# Altium PCB nrf52810_qcaa_dcdc.PcbDoc
Units mil, origin at the board's own origin, x right, y up, seen from the top; angles counter-clockwise.
Board outline 618 x 551 mil, 2 copper layers (Top Layer, Bottom Layer), stack 65.8 mil thick; 19 components, 31 nets, 72 pads, 43 vias.
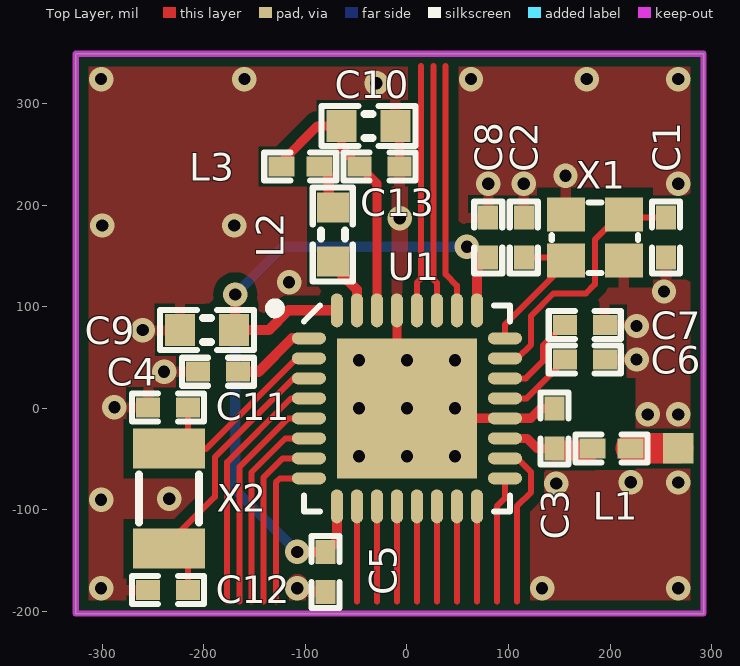
[diagram p0: Top Layer view]
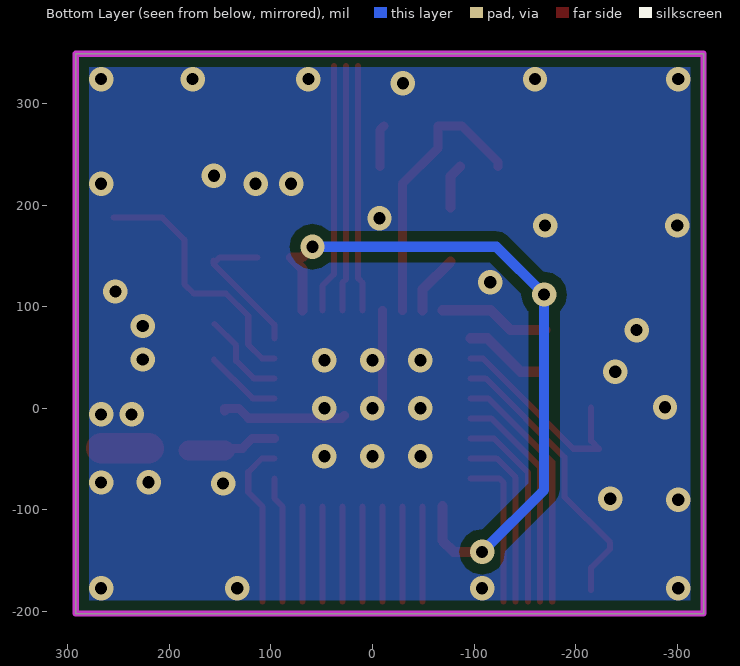
[diagram p1: Bottom Layer view, seen from below]
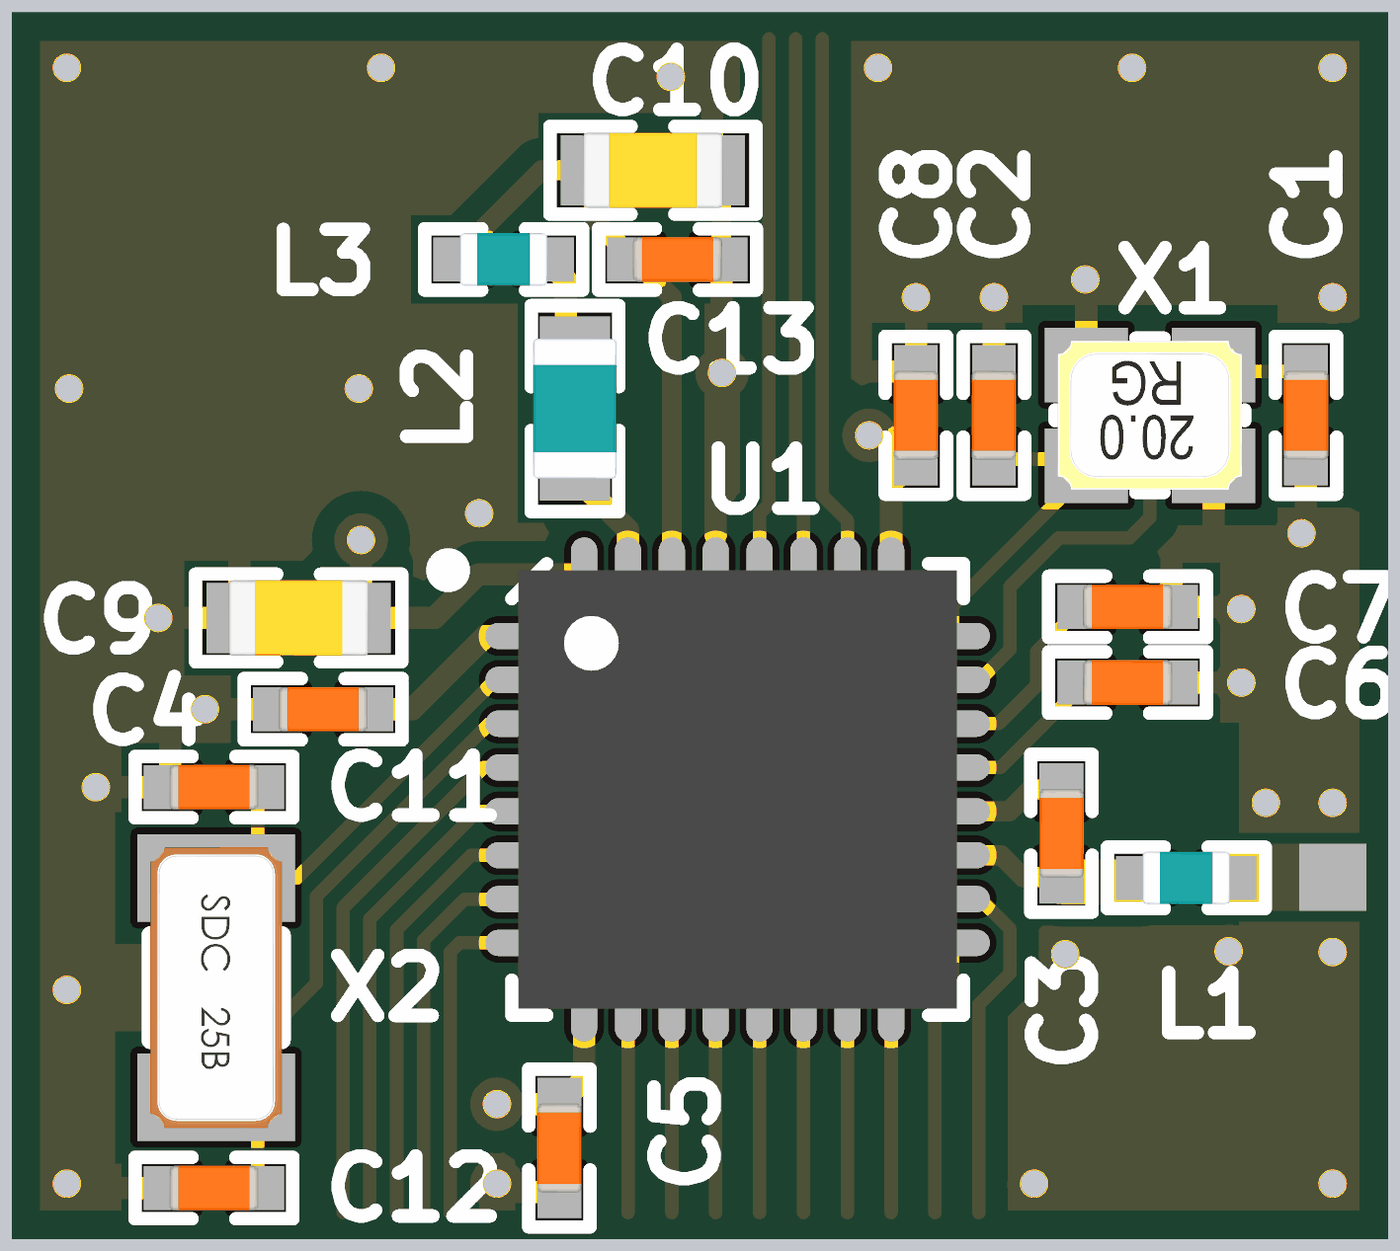
[diagram p2: 3D render of the assembled board from above, using the file's embedded part models]

## Layer stack, top to bottom
Top Solder: solder mask 0.4, Solder Resist, Dk 3.5
Top Layer: signal copper 1.4
Dielectric1: core 63, FR-4, Dk 4.8
Bottom Layer: signal copper 1.4
Bottom Solder: solder mask 0.4, Solder Resist, Dk 3.5

## Board outline
-326,-202 292,-202 292,349 -326,349

## Design rules (kind name [scope] priority, off if disabled: settings)
Clearance Polygon_ANT [(InNamedPolygon('Top_Layer-GND')) or (InNamedPolygon('Bottom_Layer-GND')) vs InNet('RF')] p1: gap=5 ignorepadtopadclearanceinfootprint=FALSE except(0: Arc-Hole Track-Hole SMDPad-Hole THPad-Hole Via-Hole Fill-Hole Poly-Hole Region-Hole Text-Hole)
Clearance Polygon [(InNamedPolygon('Top_Layer-GND')) or (InNamedPolygon('Bottom_Layer-GND'))] p2: gap=10 ignorepadtopadclearanceinfootprint=FALSE except(0: Arc-Hole Track-Hole SMDPad-Hole THPad-Hole Via-Hole Fill-Hole Poly-Hole Region-Hole Text-Hole)
Clearance [All] p3: gap=6 ignorepadtopadclearanceinfootprint=FALSE except(0: Arc-Hole Track-Hole SMDPad-Hole THPad-Hole Via-Hole Fill-Hole Poly-Hole Region-Hole Text-Hole)
ComponentClearance [All] p1 off: gap=10 collisioncheckmode=3 verticalgap=10 showdistances=FALSE
FabricationTestPointUsage TestPointUsage [All] p1: valid=0 allowmultiple=FALSE
FabricationTestpoint Testpoint [All] p1: side=3 testpointundercomponent=TRUE minsize=40 maxsize=100 preferedsize=60 minholesize=0 maxholesize=40 preferedholesize=32 testpointgrid=1 allowsidetop=TRUE allowsidebottom=TRUE usegrid=TRUE gridtolerance=0.01
Height [All] p1 off: minheight=0 maxheight=1000 prefheight=500
HoleSize [All] p1: absolutevalues=TRUE maxlimit=160 minlimit=12 maxpercent=80.000 minpercent=20.000
MinimumAnnularRing [All] p1 off: minimumring=6
PolygonConnect PolygonConnect_1 [isVia and innet(gnd)] p1: connectstyle=Direct reliefconductorwidth=10 reliefentries=4 polygonreliefangle="90 Angle" airgapwidth=10
PolygonConnect [All] p2: connectstyle=Relief reliefconductorwidth=10 reliefentries=4 polygonreliefangle="90 Angle" airgapwidth=10
RoutingVias [All] p1: holewidth=16 width=32 viastyle="Through Hole" minholewidth=10 minwidth=10 maxholewidth=28 maxwidth=50
SilkToSolderMaskClearance SilkscreenOverComponentPads [IsPad] p1: minsilkscreentomaskgap=10 clearancetoexposedcopper=TRUE
SolderMaskExpansion [All] p1: expansion=3
Width [All] p1: maxlimit=100 minlimit=6 preferedwidth=6
24 further rules are at their usual default settings.

## Components (designator, comment, footprint, x,y, rotation, side; value= is the part's Value field where it differs from the comment)
C1 "12pF" CAPC1005X04L 255,168 r270 top
C2 "12pF" CAPC1005X04L 115,168 r90 top
C3 "0.8pF" CAPC1005X04L 145.32,-19.69 r270 top
C4 "100nF" CAPC1005X04L -186,36 r180 top
C5 "100nF" CAPC1005X04L -80,-161 r270 top
C6 "N.C." CAPC1005X04L 175,48 r180 top
C7 "100pF" CAPC1005X04L 175,82 r0 top
C8 "100nF" CAPC1005X04L 80,168 r90 top
C9 "4.7µF" CAPC1608X06L -197,77 r180 top
C10 "1.0µF" CAPC1608X06L -38,278 r180 top
C11 "12pF" CAPC1005X04L -235,1 r180 top
C12 "12pF" CAPC1005X04L -235,-179 r180 top
C13 "N.C." CAPC1005X04L -27,238 r0 top
L1 "3.9nH" INDC1005X04L 201.32,-39.69 r0 top
L2 "10µH" INDC1608X06L -73,171 r270 top
L3 "15nH" INDC1005X04L -105,238 r0 top
U1 "nRF52810-QCAA" Nordic_QFN50P500X500X90-33N 0,0 r0 top locked
X1 "32MHz" BT-XTAL_2016 185,168 r180 top
X2 "32.768kHz" XTAL_3215 -234,-89 r270 top

## Footprints (in the part's own frame and the unit in brackets; to place one, negate y for a bottom-side part, rotate by r counter-clockwise, add the part's x,y. Pads: shape width x height; smd on the part's side, far side on the other; paste and mask are expansions set on the pad)
BT-XTAL_2016 [mm] "Crystal 2.0 x 1.6 mm"
  rect 0.95x0.85 smd: 1(-0.725,-0.575) 2(0.725,-0.575) 3(0.725,0.575) 4(-0.725,0.575)
  silkscreen extent -1.08,-0.88 1.08,0.88, body extent -1.05,-0.85 1.05,0.85, height 0.56
CAPC1005X04L [mm] "Chip Capacitor, 2-Leads, Body 1.0x0.5mm, IPC High Density"
  rect 0.6x0.5 smd: 1(-0.5,0) 2(0.5,0)
  silkscreen extent -0.9,-0.35 0.9,0.35, body extent -0.51,-0.25 0.51,0.25, height 0.5
CAPC1608X06L [mm] "Chip Capacitor, 2-Leads, Body 1.6x0.8mm, IPC High Density"
  rect 0.75x0.8 smd: 1(-0.675,0) 2(0.675,0)
  silkscreen extent -1.17,-0.5 1.17,0.5, body extent -0.8,-0.43 0.8,0.43, height 0.8
INDC1005X04L [mm] "Chip Inductor, 2-Leads, Body 1.0x0.5mm, IPC High Density"
  rect 0.65x0.5 smd: 1(-0.475,0) 2(0.475,0)
  silkscreen extent -0.9,-0.35 0.9,0.35, body extent -0.5,-0.3 0.5,0.3, height 0.5
INDC1608X06L [mm] "Chip Inductor, 2-Leads, Body 1.6x0.8mm, IPC High Density"
  rect 0.75x0.8 smd: 1(-0.675,0) 2(0.675,0)
  silkscreen extent -1.17,-0.5 1.17,0.5, body extent -0.8,-0.48 0.8,0.48, height 0.8
Nordic_QFN50P500X500X90-33N [mm] "QFN32 5x5x0.85mm, 0.5mm pitch - Medium Density"
  oval 0.85x0.3 smd mask+0.076: 1(-2.45,1.75) 2(-2.45,1.25) 3(-2.45,0.75) 4(-2.45,0.25) 5(-2.45,-0.25) 6(-2.45,-0.75) 7(-2.45,-1.25) 8(-2.45,-1.75) 17(2.45,-1.75) 18(2.45,-1.25) 19(2.45,-0.75) 20(2.45,-0.25) 21(2.45,0.25) 22(2.45,0.75) 23(2.45,1.25) 24(2.45,1.75)
  oval 0.3x0.85 smd mask+0.076: 9(-1.75,-2.45) 10(-1.25,-2.45) 11(-0.75,-2.45) 12(-0.25,-2.45) 13(0.25,-2.45) 14(0.75,-2.45) 15(1.25,-2.45) 16(1.75,-2.45) 25(1.75,2.45) 26(1.25,2.45) 27(0.75,2.45) 28(0.25,2.45) 29(-0.25,2.45) 30(-0.75,2.45) 31(-1.25,2.45) 32(-1.75,2.45)
  rect 3.5x3.5 smd: 33(0,0)
  silkscreen extent -3.42,-2.57 2.57,2.62, body extent -2.5,-2.5 2.5,2.5, height 0.9
XTAL_3215 [mm] "XTAL SMD 3.2 x 1.5 mm"
  rect 1x1.8 smd: 1(-1.25,0) 2(1.25,0)
  silkscreen extent -0.6,-0.75 0.6,0.75, body extent -1.6,-0.75 1.6,0.75, height 0.81

## Part data
C1 C2 C11 C12: library part C0402-12p, "Capacitor, NP0, ±2%", Footprint Doc=0402, LatestRevisionDate=2011-05-11, Note=50V, Part Number=C0402-12p, Pin Count=2, Published=2009-05-08, Publisher="Nordic Semiconductor"
C3: library part C0402-0.8p, "Capacitor, NP0, ±5%", Footprint Doc=0402, LatestRevisionDate=2012-11-21, Note=50V, Part Number=C0402-0.8p, Pin Count=2, Published=2009-05-08, Publisher="Nordic Semiconductor"
C4 C5 C8: library part C0402-100n, "Capacitor, X7R, ±10%", Footprint Doc=0402, LatestRevisionDate=2009-11-23, Note=16V, Part Number=C0402-100n, Pin Count=2, Published=2009-05-08, Publisher="Nordic Semiconductor"
C6 C13: library part C0402-N.C., "Not mounted", Assembly="Not mounted", Footprint Doc=0402, LatestRevisionDate=2009-05-08, Note="Chip Cap", Part Number=C0402-N.C., Pin Count=2, Published=2009-05-08, Publisher="Nordic Semiconductor"
C7: library part C0402-100p, "Capacitor, NP0, ±5%", Footprint Doc=0402, LatestRevisionDate=2009-05-08, Note=50V, Part Number=C0402-100p, Pin Count=2, Published=2009-05-08, Publisher="Nordic Semiconductor"
C9: library part C0603-4µ7, "Capacitor, X5R, ±10%", Footprint Doc=0603, LatestRevisionDate=2009-11-23, Note=6.3V, Part Number=C0603-4µ7, Pin Count=2, Published=2009-05-08, Publisher="Nordic Semiconductor"
C10: library part C0603-1µ0, "Capacitor, X7R, ±10%", Footprint Doc=0603, LatestRevisionDate=2013-06-05, Note=16V, Part Number=C0603-1µ0, Pin Count=2, Published=2009-05-08, Publisher="Nordic Semiconductor"
L1: library part L0402-3n9, "High frequency chip inductor ±5%", Footprint Doc=0402, LatestRevisionDate=2012-09-19, Note="High frequency chip inductor ±5%", Part Number=L0402-3n9, Pin Count=2, Published=2009-05-08, Publisher="Nordic Semiconductor"
L2: library part L0603-10µ, "Chip inductor, IDC,min = 50 mA, ±20%", Footprint Doc=0603, LatestRevisionDate=2012-09-19, Note="LBMF1608T100K 10µH 80mA 0603", Part Number=L0603-10µ, Pin Count=2, Published=2010-02-24, Publisher="Nordic Semiconductor"
L3: library part L0402-15n, "High frequency chip inductor ±10%", Footprint Doc=0402, LatestRevisionDate=2012-09-19, Note="High frequency chip inductor ±10%", Part Number=L0402-15n, Pin Count=2, Published=2010-07-12, Publisher="Nordic Semiconductor"
U1: "Multi-protocol Bluetooth Low Energy, ANT and 2.4GHz proprietary system-on-chip", Manufacturer="Nordic Semiconductor", Footprint Doc=QFN-32, LatestRevisionDate=2017-08-21, Manufacturer Part Number=nRF52810-QCAA, Note="nRF52810 - QFN32 5x5 0.5mm pitch", Part Number=nRF52810-QCAA, Pin Count=32, Published=2017-08-21, Publisher="Nordic Semiconductor"
X1: library part XTAL_SMD2016_32MHz_8pF_General, "XTAL SMD 2016, 32MHz, Cl=8pF, Total Tol: ±40ppm", Footprint Doc=XTAL_2016, LatestRevisionDate=2016-08-19, Note="XTAL SMD 32.000MHz", Part Number=XTAL_SMD2016_32MHz_8pF_General, Pin Count=4, Published=2016-08-19, Publisher="Nordic Semiconductor"
X2: library part XTAL_SMD3215_32.768kHz_9pF_General, "XTAL SMD 3215, 32.768kHz, Cl=9pF, Total Tol: ±50ppm", Footprint Doc=XTAL_3215, LatestRevisionDate=2016-08-19, Note="XTAL SMD 32.768kHz", Part Number=XTAL_SMD3215_32.768kHz_9pF_General, Pin Count=2, Published=2016-08-19, Publisher="Nordic Semiconductor"

## Free pads (board coordinates)
  rect 30x30 smd: 0(267.06,-39.43)

## Via types
v1: diameter 24, hole 12, Top Layer to Bottom Layer, tented both sides, 34 vias
v2: diameter 24, hole 12, Top Layer to Bottom Layer, tented bottom, 9 vias

## Nets (pads, with @x,y where several pads share a name; then routed paths per layer and width w, separated by ;. In a path a pad name is that pad's centre, name@x,y a point inside that pad or via, vN(x,y) a via of type N, cw(c..) or ccw(c..) an arc to the next point about the centre after c; other vN are vias at no path point)
DEC1: C4.1 U1.1 | length 83.5
  Top Layer w10: C4.1 -146,36 -113.1,68.9 U1.1
DEC2: C6.2 U1.21 | length 75.3
  Top Layer w6: U1.21 117.82,9.84 C6.2@155.98,48
DEC3: C7.1 U1.22 | length 89.9
  Top Layer w6: U1.22 117,29.53 134.19,46.72 134.19,61.87 C7.1@155.31,83
DEC4: C10.2 C13.1 L3.1 U1.30 | length 274.3
  Top Layer w9: L3.1 -123.7,242.3 -88,278 C10.2 -64.57,256.05 -29.53,221 U1.30
GND: C1.2 C2.2 C3.1 C4.2 C5.2 C6.1 C7.2 C8.2 C9.2 C10.1 C11.2 C12.2 C13.2 U1.20 U1.29 U1.33 X1.2 X1.4 | length 265.6
  Top Layer w9: C10.1 -7.31,273.89 C13.2 ; U1.29 -9.84,9.84 v2(0,0) ; U1.33@27.56,-6.89 30.51,-9.84 U1.20 121.89,-9.84 131.73,0 C3.1 ; C3.1@145.32,-2.35 C3.1@145.63,-2.35
  other v1: -301,-177 -108,-177 133,-177 267,-177 -301,-90 -234,-89 147,-74 220.32,-72.69 267,-73 237,-6 267,-6 -288,1 -239,36 226,48 -260,77 226,81 253,115 -116,124 -300,180 -170,180 -7,187 80,221 115,221 267,221 156,229 -30,320 -301,324 -160,324 63,324 177,324 267,324
  other v2: -47.24,-47.24 0,-47.24 47.24,-47.24 -47.24,0 47.24,0 -47.24,47.24 0,47.24 47.24,47.24
NetC3_2: C3.2 L1.1 U1.19 | length 88.6
  Top Layer w9: U1.19 118.11,-29.53 127.95,-39.37 C3.2 ; C3.2@145.32,-41.72 C3.2@145.63,-41.72
  Top Layer w20: C3.2@145.31,-41.53 L1.1@180.63,-41.53
NetL2_1: L2.1 L3.2 | length 44.3
  Top Layer w10: L3.2 -77,228.7 L2.1@-77,197.57
NetL2_2: L2.2 U1.31 | length 59.5
  Top Layer w10: L2.2@-77,144.43 -49.21,116.64 U1.31
P0.00/XL1: C11.1 U1.2 X2.1 | length 207.4
  Top Layer w6: C11.1 -215.32,-32.1 -223,-39.79 -197.68,-39.79 -108.68,49.21 U1.2
P0.01/XL2: C12.1 U1.3 X2.2 | length 282
  Top Layer w6: C12.1 -215.32,-156.9 X2.2 -234,-132 -189,-87 -189,-48.08 -111.39,29.53 U1.3
P0.04/AIN2: U1.4 | length 243.5
  Top Layer w6: -177,-190 -177,-53.05 -114.11,9.84 U1.4
P0.05/AIN3: U1.5 | length 220.5
  Top Layer w6: -165,-190 -165,-58.02 -116.82,-9.84 U1.5
P0.06: U1.6 | length 197.4
  Top Layer w6: -153,-190 -153,-62.99 -119.54,-29.53 U1.6
P0.09: U1.7 | length 174.3
  Top Layer w6: -141,-190 -141,-67.96 -122.25,-49.21 U1.7
P0.10: U1.8 | length 151.3
  Top Layer w6: -129,-190 -129,-72.93 -124.97,-68.9 U1.8
P0.12: U1.10 | length 93.5
  Top Layer w6: -49.21,-190 U1.10
P0.14: U1.11 | length 93.5
  Top Layer w6: -29.53,-190 U1.11
P0.15: U1.12 | length 93.5
  Top Layer w6: -9.84,-190 U1.12
P0.16: U1.13 | length 93.5
  Top Layer w6: 9.84,-190 U1.13
P0.18: U1.14 | length 93.5
  Top Layer w6: 29.53,-190 U1.14
P0.20: U1.15 | length 93.5
  Top Layer w6: 49.21,-190 U1.15
P0.21: U1.16 | length 93.5
  Top Layer w6: 68.9,-190 U1.16
P0.25: U1.26 | length 245.2
  Top Layer w6: 38,337 38,131.97 49.21,120.76 U1.26
P0.28/AIN4: U1.27 | length 242
  Top Layer w6: 26,337 26,127 29.53,123.47 U1.27
P0.30/AIN6: U1.28 | length 242.3
  Top Layer w6: U1.28 9.84,123.84 14,128 14,337
RF: L1.2 pad.0 | length 46.7
  Top Layer w30: L1.2@220.33,-39.43 pad.0
SWDCLK: U1.17 | length 124.4
  Top Layer w6: 88.58,-190 88.58,-96.46 96.46,-88.58 U1.17
SWDIO: U1.18 | length 164.4
  Top Layer w6: U1.18 108.68,-49.21 122.19,-62.72 122.19,-82.54 108.27,-96.46 108.27,-190
VDD_NRF: C5.1 C8.1 C9.1 U1.9 U1.25 U1.32 | length 830.6
  Top Layer w10: v1(-169,112) -169,78.43 C9.1 -136,77 -116.54,96.46 U1.32 ; v1(-108,-141.32) C5.1 -68.9,-130.21 U1.9 ; v1(59,159) 69.68,148.31 C8.1 68.9,137.21 U1.25
  Bottom Layer w10: v1(-108,-141.32) -169,-80.32 v1(-169,112) -122,159 v1(59,159)
XC1: C1.1 U1.23 X1.1 | length 258.2
  Top Layer w6: U1.23 108.68,49.21 122.19,62.72 122.19,91 144.19,113 176,113 185,122 185,166 206.68,187.68 C1.1
XC2: C2.1 U1.24 X1.3 | length 147.2
  Top Layer w6: U1.24 96.46,82.46 156.46,142.46 X1.3@156.46,142.52 ; C2.1@113,148.31 C2.1 150.66,148.31 X1.3@156.46,142.52 ; X1.3 X1.3@156.46,142.52

## Polygon pours and split planes (outlines as drawn)
GND on Top Layer "Top_Layer-GND" (solid, remove dead copper, pour order 1000): -353,410 -353,-266.19 363,-266.19 363,410 -353,410
GND on Bottom Layer "Bottom_Layer-GND" (solid, remove dead copper, pour order 1001): -373,400 -373,-266.19 394,-266.19 394,400 -373,400

## Keep-outs
Keep-Out Layer:
  the board outline again, w6

## Other copper
Top Layer:
  pour cut-out: 225,-61.03 117,-61.03 117,30 225,30

## Silkscreen, mask and mechanical layers (free items; w line width, h text height)
Mechanical 1:
  the board outline again, w6

## Dimensions
292,349 to 292,-202 on Mechanical 3
-326,-202 to 292,-202 on Mechanical 3